# Altium PCB usb_to_can.PcbDoc
Units mm, origin at the board's own origin, x right, y up, seen from the top; angles counter-clockwise.
Board outline 46.4 x 30 mm, 4 copper layers (Top Layer, Signal Layer 1, Signal Layer 2, Bottom Layer), stack 0.778 mm thick; 58 components, 49 nets, 278 pads, 67 vias.
Unrouted connection lines stored in the file: 1.
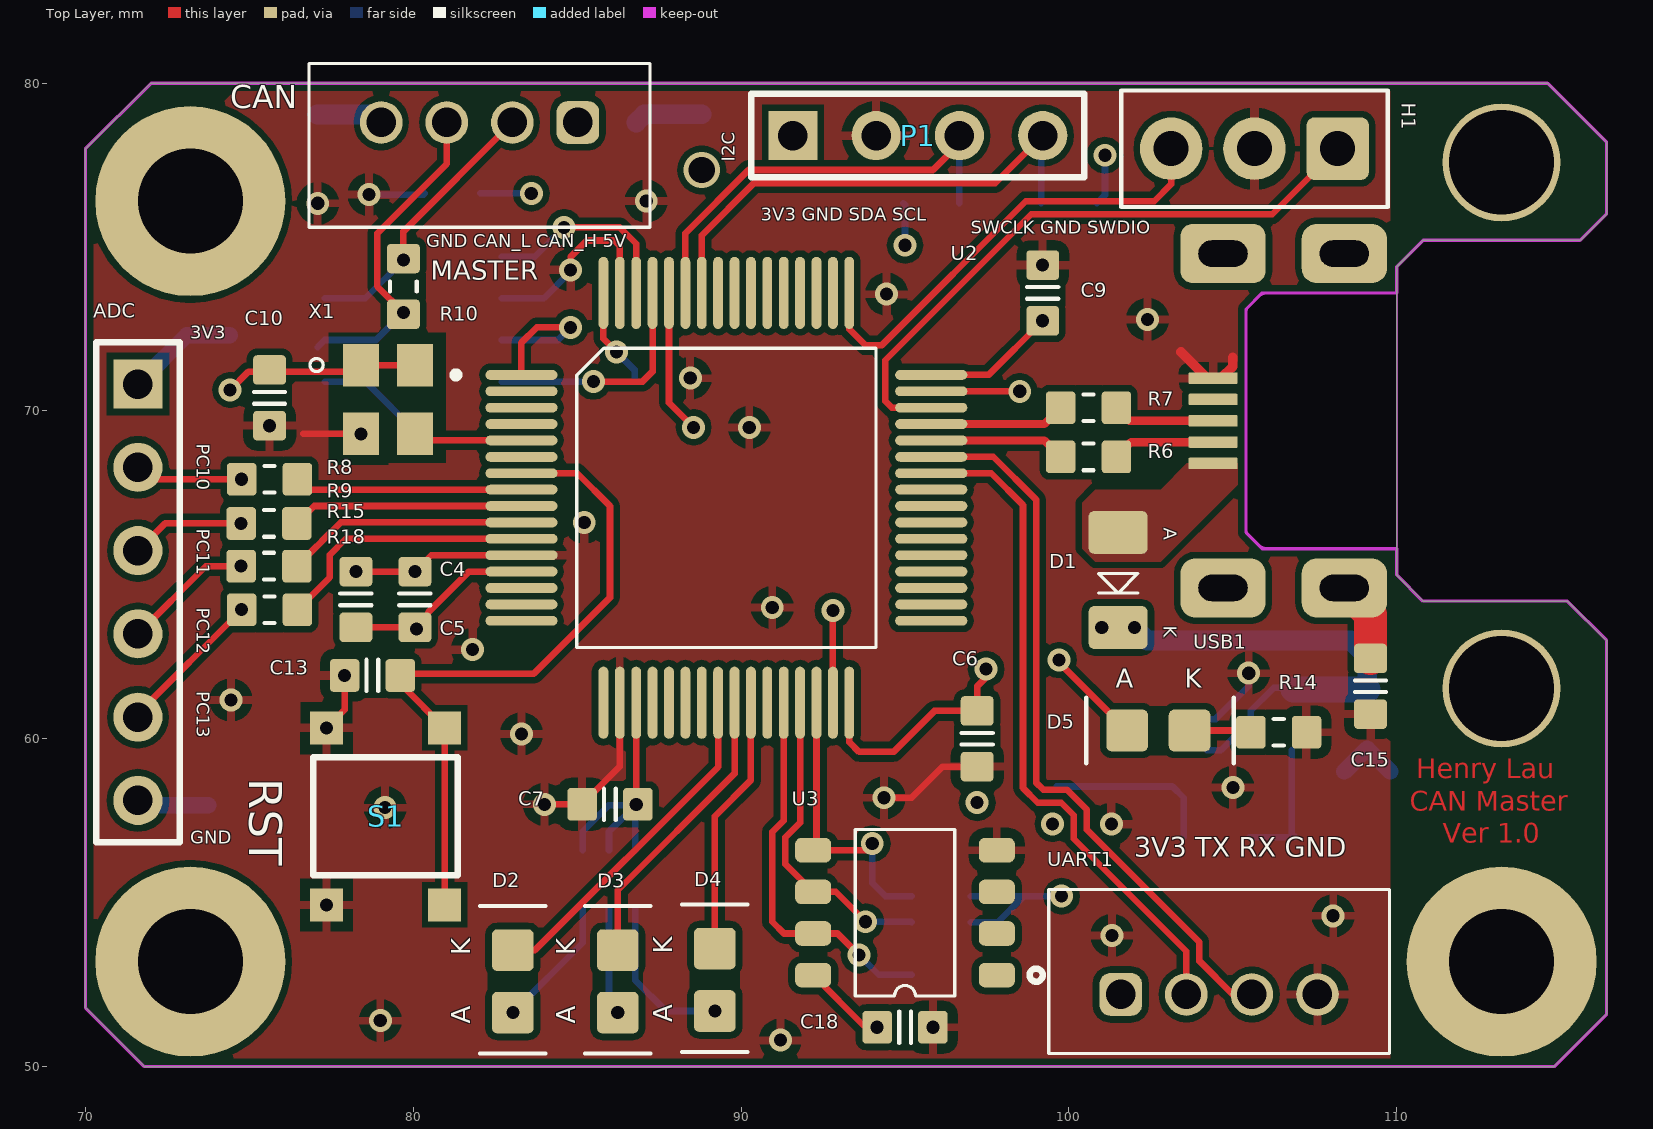
[diagram p0: Top Layer view]
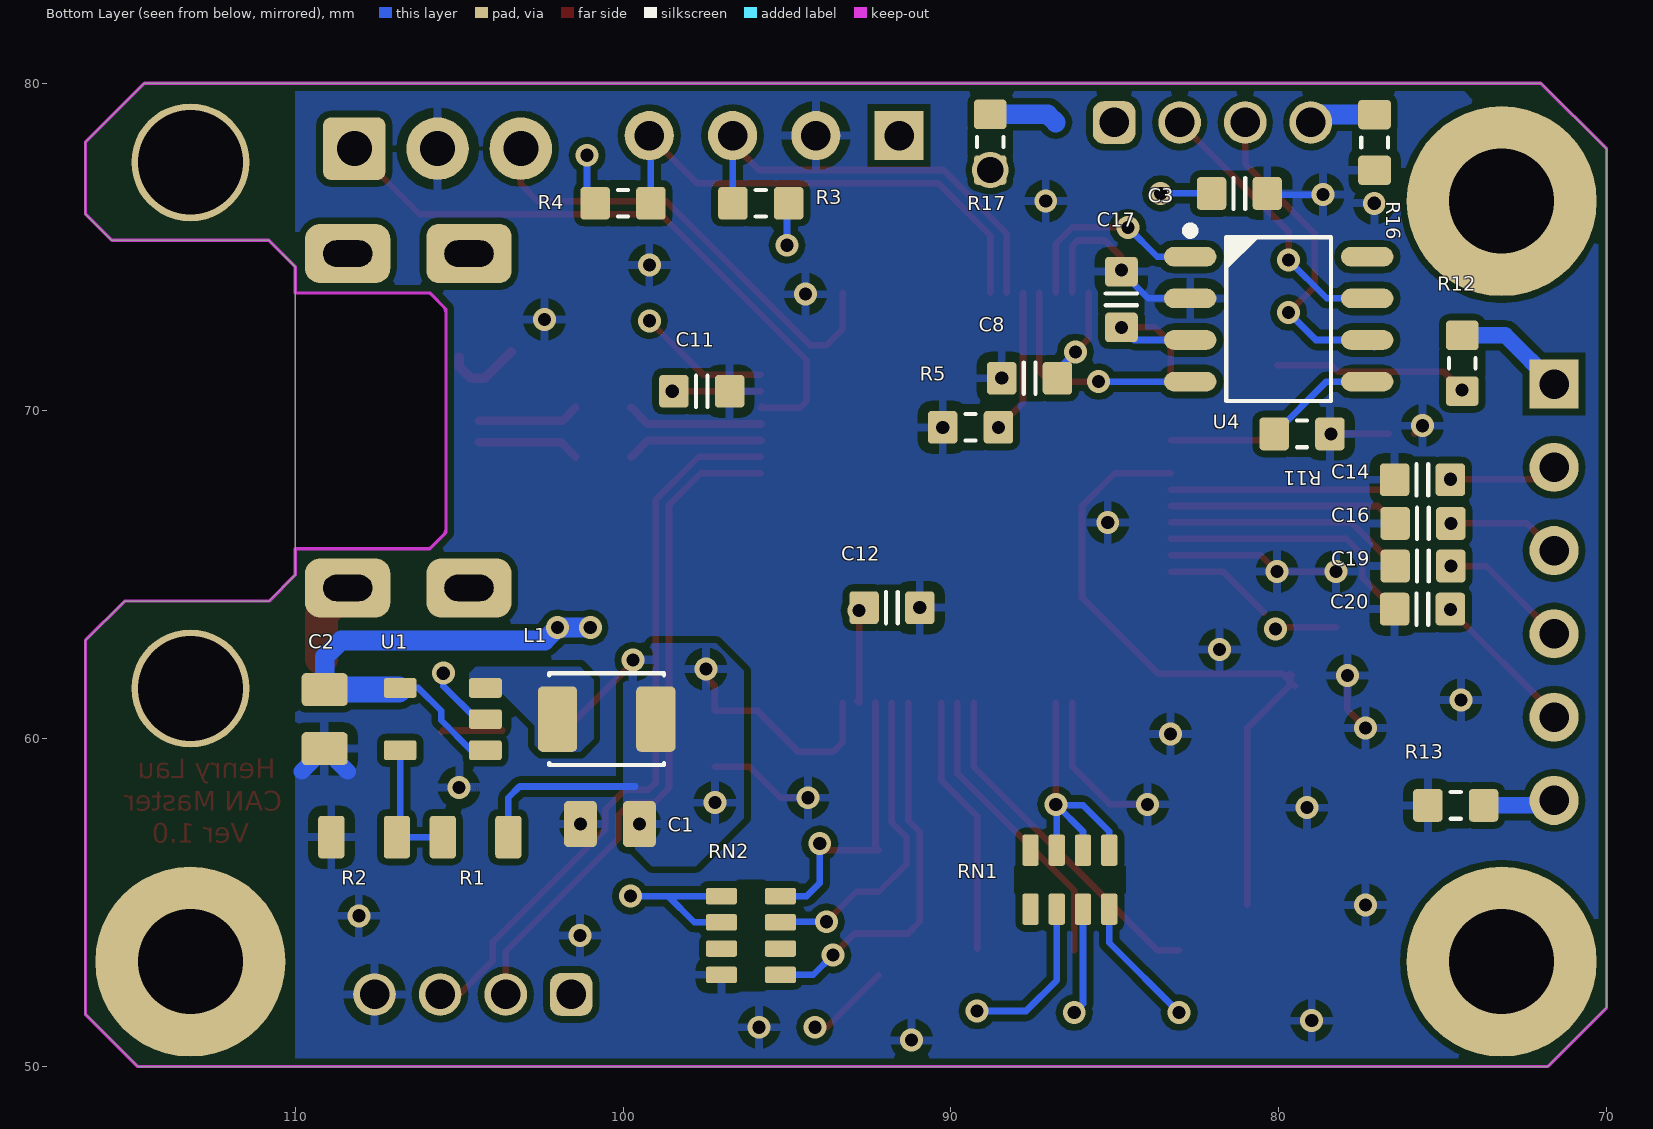
[diagram p1: Bottom Layer view, seen from below]
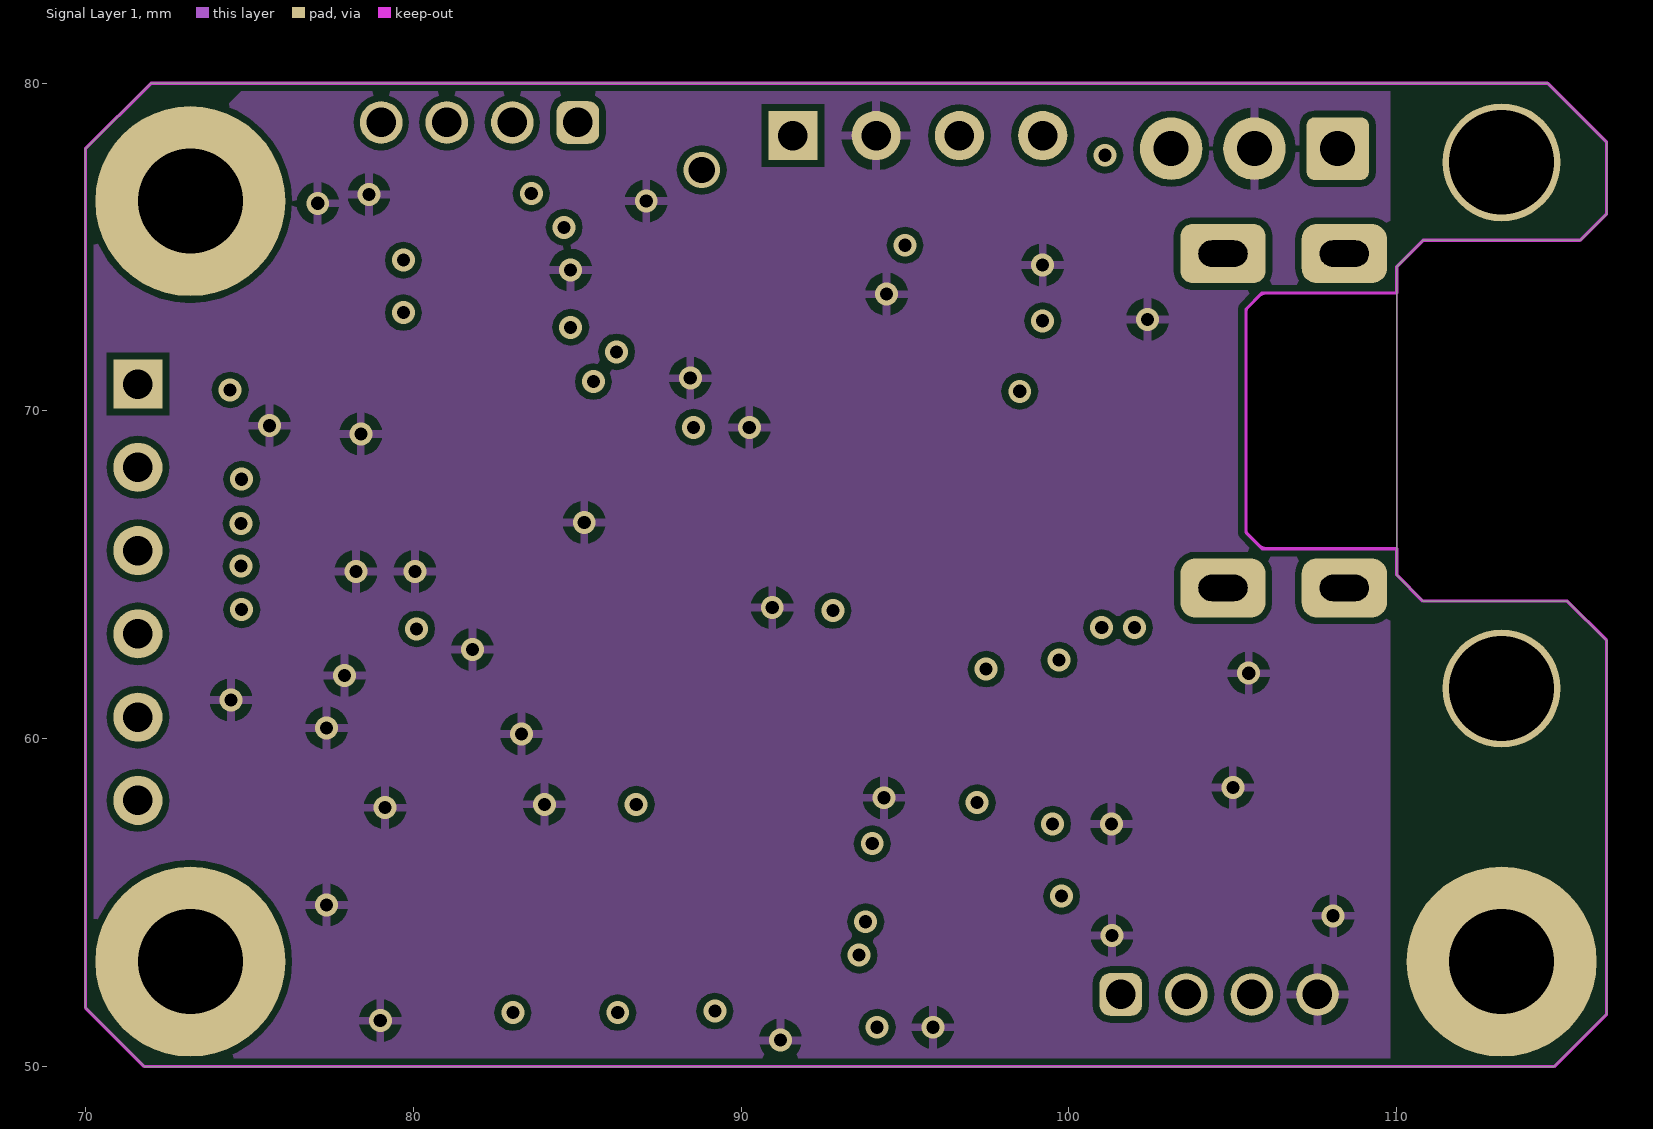
[diagram p2: Signal Layer 1]
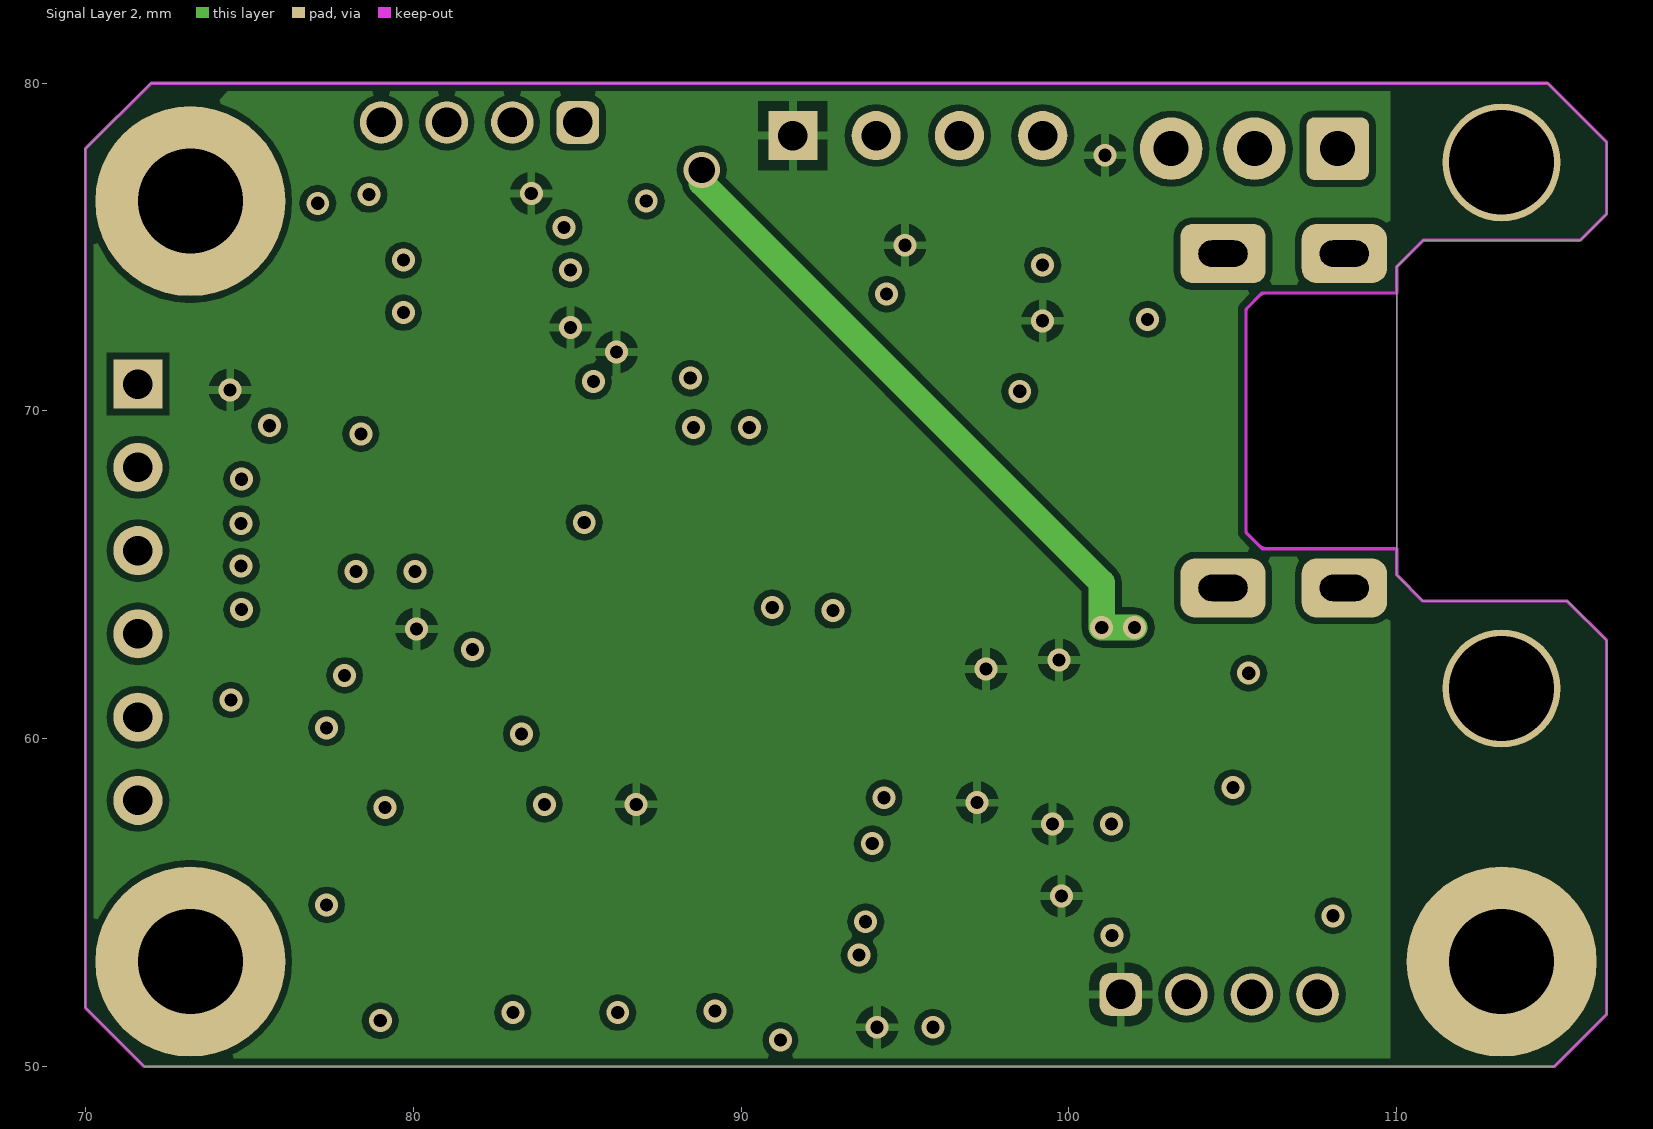
[diagram p3: Signal Layer 2]
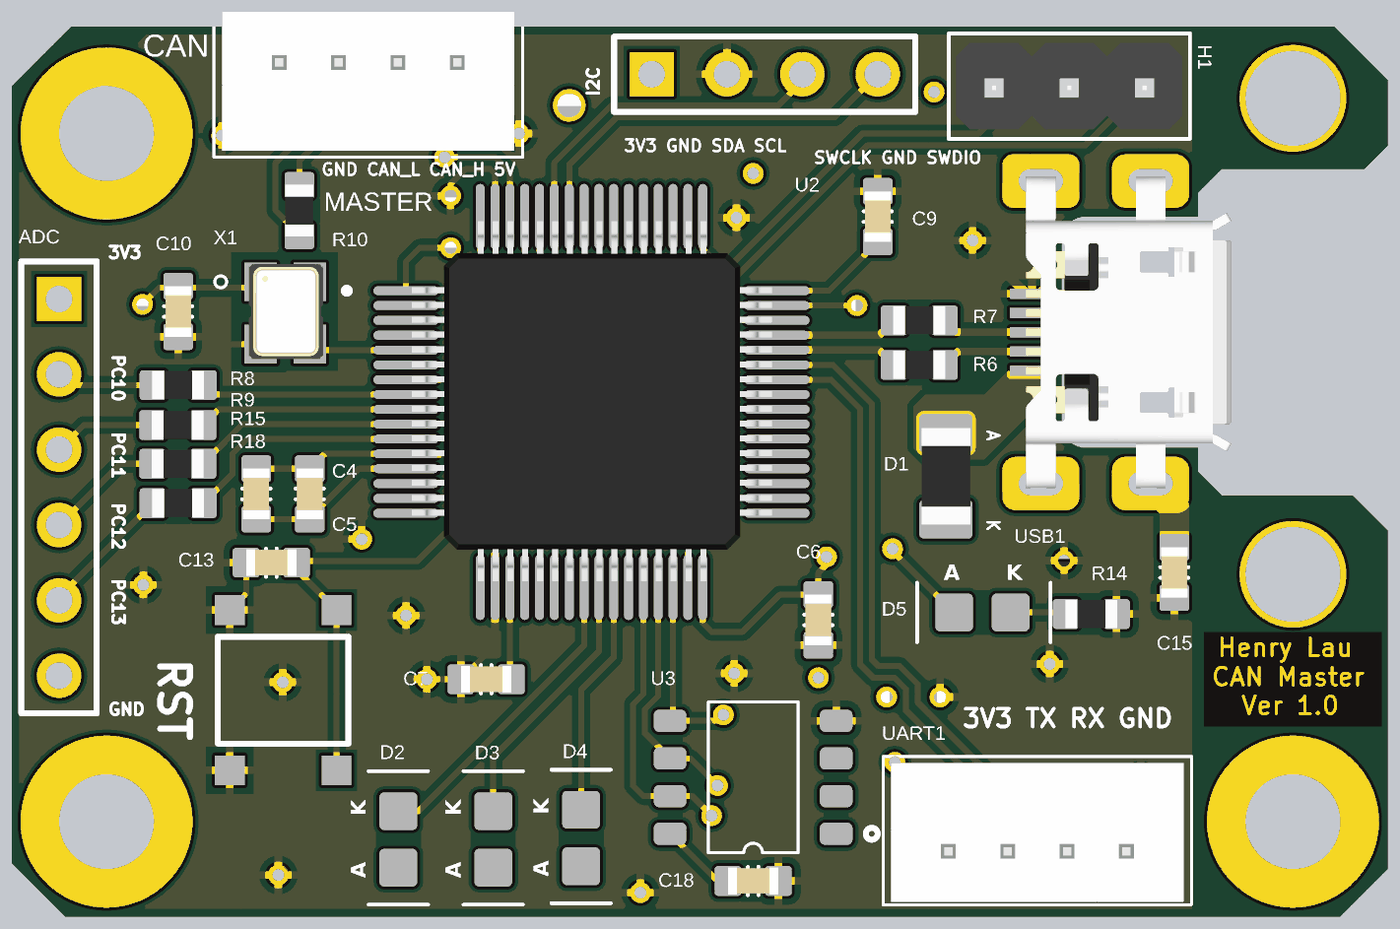
[diagram p4: 3D render of the assembled board from above, using the file's embedded part models]
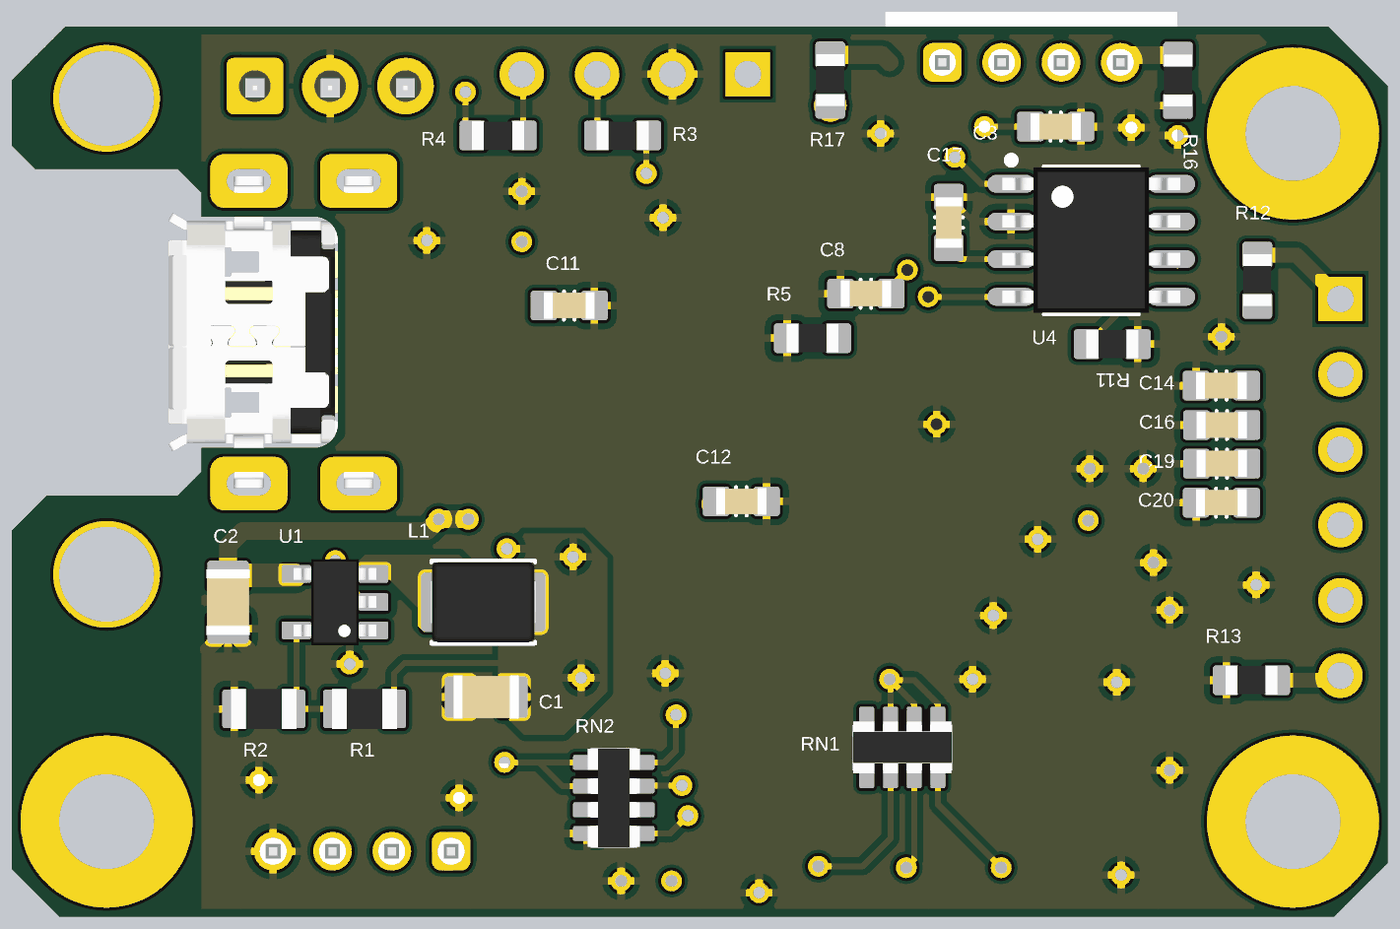
[diagram p5: 3D render of the assembled board from below, using the file's embedded part models]

## Layer stack, top to bottom
Top Solder: solder mask 0.0102, Solder Resist, Dk 3.5
Top Layer: signal copper 0.0356
Dielectric 1: core 0.254, FR-4, Dk 4.2
Signal Layer 1: signal copper 0.036
Dielectric 3: prepreg 0.127, Dk 4.2
Signal Layer 2: signal copper 0.036
Dielectric 2: core 0.254, Dk 4.2
Bottom Layer: signal copper 0.0356
Solder Side: solder mask 0.0102, Solder Resist, Dk 3.5

## Board outline
70,51.8 70,78 72,80 110,80 114.6,80 116.4,78.2 116.4,76 115.6,75.2 110.8,75.2 110,74.4 110,65 110.8,64.2 115.2,64.2 116.4,63 116.4,51.6 114.8,50 110,50 71.8,50

## Design rules (kind name [scope] priority, off if disabled: settings)
Clearance [All] p1: gap=0.2 ignorepadtopadclearanceinfootprint=FALSE
HoleSize [All] p1: absolutevalues=TRUE maxlimit=100 minlimit=0.4 maxpercent=80.000 minpercent=20.000
MinimumSolderMaskSliver [All] p1: minsoldermaskwidth=0.08
PolygonConnect power [InNet('NETL1_1','NetD1_A') OR InComponent('C1','L1')] p1: connectstyle=Direct reliefconductorwidth=0.254 reliefentries=4 polygonreliefangle="90 Angle" airgapwidth=0.254
PolygonConnect [All] p2: connectstyle=Relief reliefconductorwidth=0.254 reliefentries=4 polygonreliefangle="90 Angle" airgapwidth=0.3
RoutingVias [All] p1: holewidth=0.4 width=0.7 viastyle="Through Hole" minholewidth=0.4 minwidth=0.7 maxholewidth=99 maxwidth=100
SilkToSilkClearance [All] p1: silktosilkclearance=0.08
SilkToSolderMaskClearance [IsPad] p1: minsilkscreentomaskgap=0.08 clearancetoexposedcopper=TRUE
SolderMaskExpansion [All] p1: expansion=0.102
Width [All] p1: maxlimit=100 minlimit=0.2 preferedwidth=0.2
26 further rules are at their usual default settings.

## Components (designator, comment, footprint, x,y, rotation, side; value= is the part's Value field where it differs from the comment)
ADC "Header 6" HDR1X6 71.6,70.82 r270 top
C1 "Cap" CAPC2012X135N 100.4,57.4 r180 bottom value=22u
C2 "Cap" CAPC2012X135N 109.103,60.6 r90 bottom value=10u
C3 "Cap" CAPC1608X90N 81.2,76.634 r0 bottom value=1u
C4 "Cap" CAPC1608X90N 78.25,64.25 r270 top value=1u
C5 "Cap" CAPC1608X90N 80.05,64.25 r270 top value=1u
C6 "Cap" CAPC1608X90N 97.2,60 r90 top value=1u
C7 "Cap" CAPC1608X90N 86,58 r0 top value=1u
C8 "Cap" CAPC1608X90N 87.6,71 r180 bottom value=1u
C9 "Cap" CAPC1608X90N 99.2,73.6 r270 top value=0.1u
C10 "Cap" CAPC1608X90N 75.615,70.4 r90 top value=1u
C11 "Cap" CAPC1608X90N 97.6,70.6 r0 bottom value=4.7u
C12 "Cap" CAPC1608X90N 91.8,64 r0 bottom value=4.7u
C13 "Cap" CAPC1608X90N 78.755,61.932 r0 top value=0.1u
C14 "Cap" CAPC1608X90N 75.615,67.9 r180 bottom value=0.1u
C15 "Cap" CAPC1608X90N 109.2,61.6 r270 top value=10p
C16 "Cap" CAPC1608X90N 75.6,66.57 r180 bottom value=0.1u
C17 "Cap" CAPC1608X90N 84.8,73.4 r270 bottom value=0.1u
C18 "Cap" CAPC1608X90N 95,51.2 r0 top value=0.1u
C19 "Cap" CAPC1608X90N 75.6,65.27 r180 bottom value=0.1u
C20 "Cap" CAPC1608X90N 75.615,63.955 r180 bottom value=0.1u
CAN "Header 4" 1X4_HDR_2.00mm_PH 85.022,78.8 r180 top
D1 "diode" DIODE_3216_70N 101.5,64.844 r270 top
D2 "LED_Green_GullWing" LED-0805-A 83.038,52.6 r90 top
D3 "LED_Green_GullWing" LED-0805-A 86.238,52.6 r90 top
D4 "LED_Green_GullWing" LED-0805-A 89.2,52.647 r90 top
D5 "LED_Green_GullWing" LED-0805-A 102.728,60.252 r0 top
H1 "ST-Link" 1x3POS_HEADER 105.66,78 r270 top
L1 "inductor" INDM3225X240N 100.5,60.6 r180 bottom value=2u2
P1 "Header 4" HDR1X4 91.58,78.4 r0 top
R1 "Res1" RESC2012X70N 104.5,57 r180 bottom value=100K
R2 "Res1" RESC2012X70N 107.9,57 r180 bottom value=22K
R3 "Res1" RESC1608X55N 95.8,76.334 r180 bottom value=4K7
R4 "Res1" RESC1608X55N 100,76.334 r0 bottom value=4K7
R5 "Res1" RESC1608X55N 89.4,69.5 r180 bottom value=10K
R6 "Res1" RESC1608X55N 100.6,68.6 r0 top value=22R
R7 "Res1" RESC1608X55N 100.6,70.1 r0 top value=22R
R8 "Res1" RESC1608X55N 75.615,67.918 r180 top value=1K
R9 "Res1" RESC1608X55N 75.6,66.57 r180 top value=1K
R10 "Res1" RESC1608X55N 79.7,73.8 r270 top value=120
R11 "Res1" RESC1608X55N 79.289,69.3 r0 bottom value=20K
R12 "Res1" RESC1608X55N 74.4,71.456 r270 bottom value=0R
R13 "Res1" RESC1608X55N 74.6,57.968 r0 bottom value=0R
R14 "Res1" RESC1608X55N 106.4,60.2 r0 top value=1K
R15 "Res1" RESC1608X55N 75.6,65.266 r180 top value=1K
R16 "Res1" RESC1608X55N 77.077,78.192 r270 bottom value=0R
R17 "Res1" RESC1608X55N 88.8,78.2 r270 bottom value=0R
R18 "Res1" RESC1608X55N 75.615,63.938 r180 top value=1K
RN1 "resistor network" RESCAXS50P160X320X70-8N 86.371,55.7 r270 bottom value=1K
RN2 "resistor network" RESCAXS50P160X320X70-8N 96.1,54 r180 bottom value=4K7
S1 "SW_THT_PB_4.3mm" TACT_SWT-SMD-4.4 76.955,55.432 r90 top
U1 "TLV62569" SOT23-5 105.5,60.6 r0 bottom
U2 "STM32F405RE" LQFP64 83.3,71.1 r0 top
U3 "EEPROM" SOP8 97.8,52.79 r180 top
U4 "SN65HVD23x" SOIC127P600X175-8AN 80,72.8 r180 bottom
UART1 "Programmer" 1X4_HDR_2.00mm_PH 101.582,52.2 r0 top
USB1 "USB Micro Type B" USB_MICRO-B 110,69.7 r90 top
X1 "ASE-8.000MHZ-LC-T" "ASE Series" 80.05,71.4 r270 top

## Footprints (in the part's own frame and the unit in brackets; to place one, negate y for a bottom-side part, rotate by r counter-clockwise, add the part's x,y. Pads: shape width x height; smd on the part's side, far side on the other; paste and mask are expansions set on the pad)
1x3POS_HEADER [mil] "Connector Header, Single-row 3-position, 0.100\" pitch"
  rrect25% 75x75 hole 42: 1(0,100)
  round 75 hole 42: 2(0,0) 3(0,-100)
  silkscreen extent -70,-160 70,160, body extent -57,-150 57,150, height 335
1X4_HDR_2.00mm_PH [mm]
  rrect50% 1.3x1.3 hole 0.9: 1(0,0)
  round 1.3 hole 0.9: 2(2,0) 3(4,0) 4(6,0)
  silkscreen extent -2.2,-1.8 8.2,3.2, body extent -1.93,-1.7 7.93,2.97, height 5.89
"ASE Series" [mm] "Footprint used for ASE SERIES standard clock oscillator"
  rect 1.3x1.1 smd: 1(0,-1.65) 2(2.1,-1.65) 3(2.1,0) 4(0,0)
  silkscreen extent -0.2,-3.2 0.2,-2.8, body extent -0.6,-2.05 2.6,0.45, height 1.2
CAPC1608X90N [mm] "Chip Capacitor, Body 1.6x0.8mm, EIA 0603, IPC Medium Density"
  round 0.254 on Mech15: 0(0,0)
  rrect25% 0.9x1 smd: 1(-0.85,0) 2(0.85,0)
  Top Layer pour cut-out: -0.6,0.5 -0.4,0.7 0.4,0.7 0.6,0.5 0.6,-0.5 0.4,-0.7 -0.4,-0.7 -0.6,-0.5
  silkscreen extent -0.18,-0.48 0.18,0.48, body extent -0.85,-0.45 0.85,0.45, height 0.89
CAPC2012X135N [mm]
  round 0.254 on Mech15: 0(0,0)
  rrect25% 1x1.4 smd: 1(-0.9,0) 2(0.9,0)
  body extent -1.1,-0.72 1.1,0.73, height 1.34
DIODE_3216_70N [mm]
  round 0.508 on Mech15: 0(0,0)
  rrect25% 1.3x1.8 smd: A(-1.45,0) K(1.45,0)
  silkscreen extent -0.2,-0.6 0.4,0.6, body extent -1.62,-0.82 1.63,0.83, height 0.69
HDR1X4 [mm] "Connector; Header; 4 Position"
  rect 1.5x1.5 hole 0.9: 1(0,0)
  round 1.5 hole 0.9: 2(2.54,0) 3(5.08,0) 4(7.62,0)
  silkscreen extent -1.27,-1.27 8.89,1.27
HDR1X6 [mm] "Connector; Header; 6 Position"
  rect 1.5x1.5 hole 0.9: 1(0,0)
  round 1.5 hole 0.9: 2(2.54,0) 3(5.08,0) 4(7.62,0) 5(10.16,0) 6(12.7,0)
  silkscreen extent -1.27,-1.27 13.97,1.27
INDM3225X240N [mm] "Molded Inductor, 2-Leads, Body 3.2x2.5mm, IPC Medium Density"
  round 0.508 on Mech15: 0(0,0)
  rrect25% 1.2x2 smd: 1(-1.5,0) 2(1.5,0)
  silkscreen extent -1.75,-1.4 1.75,1.4, body extent -1.79,-1.35 1.79,1.35, height 2.4
LED-0805-A [mil]
  round 20 on Mech15: 0(0,0)
  rrect25% 50x50 smd: A(-37.5,0) K(37.5,0)
  Top Layer pour cut-out: -15,30 15,30 15,-30 -15,-30
  silkscreen extent -87,-39 91,39, body extent -39,-25 39,25, height 31
LQFP64 [mm]
  oval 2.2x0.3 smd: 1(0,0) 2(0,-0.5) 3(0,-1) 4(0,-1.5) 5(0,-2) 6(0,-2.5) 7(0,-3) 8(0,-3.5) 9(0,-4) 10(0,-4.5) 11(0,-5) 12(0,-5.5) 13(0,-6) 14(0,-6.5) 15(0,-7) 16(0,-7.5) 33(12.5,-7.5) 34(12.5,-7) 35(12.5,-6.5) 36(12.5,-6) 37(12.5,-5.5) 38(12.5,-5) 39(12.5,-4.5) 40(12.5,-4) 41(12.5,-3.5) 42(12.5,-3) 43(12.5,-2.5) 44(12.5,-2) 45(12.5,-1.5) 46(12.5,-1) 47(12.5,-0.5) 48(12.5,0)
  oval 0.3x2.2 smd: 17(2.5,-10) 18(3,-10) 19(3.5,-10) 20(4,-10) 21(4.5,-10) 22(5,-10) 23(5.5,-10) 24(6,-10) 25(6.5,-10) 26(7,-10) 27(7.5,-10) 28(8,-10) 29(8.5,-10) 30(9,-10) 31(9.5,-10) 32(10,-10) 49(10,2.5) 50(9.5,2.5) 51(9,2.5) 52(8.5,2.5) 53(8,2.5) 54(7.5,2.5) 55(7,2.5) 56(6.5,2.5) 57(6,2.5) 58(5.5,2.5) 59(5,2.5) 60(4.5,2.5) 61(4,2.5) 62(3.5,2.5) 63(3,2.5) 64(2.5,2.5)
  silkscreen extent -2.1,-8.31 10.81,0.81, body extent 0.2,-9.8 12.34,2.34, height 1.6
RESC1608X55N [mm] "Chip Resistor, Body 1.6x0.8mm, EIA 0603, IPC Medium Density"
  round 0.254 on Mech15: 0(0,0)
  rrect25% 0.9x1 smd: 1(-0.85,0) 2(0.85,0)
  Top Layer pour cut-out: -0.6,0.5 -0.4,0.7 0.4,0.7 0.6,0.5 0.6,-0.5 0.4,-0.7 -0.4,-0.7 -0.6,-0.5
  silkscreen extent -0.15,-0.41 0.15,0.41, body extent -0.87,-0.47 0.88,0.48, height 0.54
RESC2012X70N [mm]
  rrect25% 0.8x1.3 smd: 1(-1,0) 2(1,0)
  body extent -1.1,-0.67 1.1,0.68, height 0.69
RESCAXS50P160X320X70-8N [mm] "Resistor Pack, Body 1.6x3.2mm, 4x0603, IPC Medium Density"
  round 0.254 on Mech15: 0(0,0)
  rrect25% 0.95x0.5 smd: 1(-0.9,1.2) 2(-0.9,0.4) 3(-0.9,-0.4) 4(-0.9,-1.2) 5(0.9,-1.2) 6(0.9,-0.4) 7(0.9,0.4) 8(0.9,1.2)
  Top Layer pour cut-out: -0.4,1.7 0.4,1.7 0.4,-1.7 -0.4,-1.7
  body extent -0.87,-1.68 0.88,1.67, height 0.7
SOIC127P600X175-8AN [mm] "SOIC, 8-Leads, Body 4.9x3.9mm, Pitch 1.27mm, IPC Medium Density"
  round 1 on Mech15: 0(0,0)
  oval 1.6x0.6 smd: 1(-2.7,1.905) 2(-2.7,0.635) 3(-2.7,-0.635) 4(-2.7,-1.905) 5(2.7,-1.905) 6(2.7,-0.635) 7(2.7,0.635) 8(2.7,1.905)
  silkscreen extent -2.83,-2.5 1.6,2.82, body extent -3,-2.45 3,2.45, height 1.75
SOP8 [mm]
  rrect50% 1.1x0.75 smd: 1(0,0) 2(0,-1.27) 3(0,-2.54) 4(0,-3.81) 5(5.6,-3.81) 6(5.6,-2.54) 7(5.6,-1.27) 8(5.6,0)
  silkscreen extent -1.4,-4.44 4.32,0.64
SOT23-5 [mm]
  rrect25% 1x0.6 smd: 1(-1.3,0.95) 2(-1.3,0) 3(-1.3,-0.95) 4(1.3,-0.95) 5(1.3,0.95)
  body extent -1.4,-1.45 1.4,1.45, height 1.44
TACT_SWT-SMD-4.4 [mm]
  rect 1x1 smd mask+0.102: 1(-0.5,-4) 1(4.9,-4) 2(-0.5,-0.4) 2(4.9,-0.4)
  silkscreen extent 0.4,-4.4 4,0
USB_MICRO-B [mm]
  round 0.508 on Mech15: 0(0,0)
  rrect20% 0.35x1.5 smd: 1(-1.3,5.6) 2(-0.65,5.6) 3(0,5.6) 4(0.65,5.6) 5(1.3,5.6)
  rrect50% 1.8x2.6 hole 0.8 slot 1.5 at 90 deg: SH(-5.1,1.6) SH(-5.1,5.3) SH(5.1,1.6)
  rrect40% 1.8x2.6 hole 0.8 slot 1.5 at 90 deg: SH(5.1,5.3)
  Keep-Out Layer board cut-out: -3.9,0 -3.9,3.797 -3.839,4.103 -3.666,4.362 -3.406,4.536 -3.1,4.597 -3.1,4.597 3.1,4.597 3.406,4.536 3.666,4.362 3.839,4.103 3.9,3.797 3.9,3.797 3.9,0
  body extent -5.25,-1.12 5.25,5.8, height 2.15

## Part data
ADC: "Header, 6-Pin", LatestRevisionDate=17-Jul-2002, LatestRevisionNote="Re-released for DXP Platform.", Publisher="Altium Limited"
C1 C2 C3 C4 C5 C6 C7 C8 C9 C10 C11 C12 C13 C14 C15 C16 C17 C18 C19 C20: "Capacitor", LatestRevisionDate=17-Jul-2002, LatestRevisionNote="Re-released for DXP Platform.", PackageDescription="Radial Cap, Thru-Hole; 2 Leads; 0.3 in Pin Spacing", PackageReference=RAD-0.3, Published=8-Jun-2000, Publisher="Altium Limited"
CAN P1: "Header, 4-Pin", LatestRevisionDate=17-Jul-2002, LatestRevisionNote="Re-released for DXP Platform.", Publisher="Altium Limited"
D1: library part SD1206S040S2R0, "100V 1A", ComponentLink1Description=mouser, ComponentLink1URL=https://www.mouser.hk/ProductDetail/AVX/SD1206S040S2R0?qs=jCA%252BPfw4LHbfEJl0sZ31oA%3D%3D
D2 D3 D4 D5: "LED Gull-wing SMD High-intensity Green 450mcd 574nm", Color=Green, Manufacturer 1=Ligitek, Manufacturer Part Number 1=L8UG9033/TR1, Package / Case="4.6mm Gull-Wing", Ratings="450 mcd; 574 nm", Material=AlGaInP, SCDType=source
H1: "ST-Link header with silkscreen"
L1: library part INDC, "IHLP SMD 4040", link=http://www.mouser.hk/ProductDetail/Panasonic/ETQ-P5M4R7YFC/?qs=sGAEpiMZZMsg%252by3WlYCkUx1BJssUTVH58rrEHsPkNus%3d
R1 R2 R3 R4 R5 R6 R7 R8 R9 R10 R11 R12 R13 R14 R15 R16 R17 R18: "Resistor", LatestRevisionDate=17-Jul-2002, LatestRevisionNote="Re-released for DXP Platform.", PackageDescription="Axial Device, Thru-Hole; 2 Leads; 0.3 in Pin Spacing", PackageReference=AXIAL-0.3, Published=8-Jun-2000, Publisher="Altium Limited"
RN1 RN2: library part RES_NET
S1: "Switch, tact, 4.3mm stem", Manufacturer 1=Bond-Tact, Manufacturer Part Number 1=TS-1143-WP-300, Package / Case="6.5x6.5mm; 4.3mm stem", Function=Speed, Material="Brass/Nylon/Ag plating", SCDType=spec
U1: "2-A High Efficiency Synchronous Buck Converter in SOT Package", Manufacturer=TI, Iout(max)=2A, Vin=2.5-5.5V
U2: "STM32F405RE 64 pin package, Cortex M4 core with up to"
U3: library part AT24C64, "64K EEPROM"
U4: "SN65HVD23x 3.3-V CAN Bus Transceivers", ComponentLink1Description=Datasheet, ComponentLink1URL=https://www.ti.com/lit/ds/symlink/sn65hvd230.pdf?ts=1604457324049&ref_url=https%253A%252F%252Fwww.google.com%252F
UART1: library part Header4P, "Header 4-pin"
USB1: library part USB_Micro_TypeB, "Connector SMD USB Micro Type B middle mount", Manufacturer 1="Molex Inc", Manufacturer Part Number 1=47491-0001, Package / Case=SMD, Supplier Part Number 1=WM17142CT-ND, SCDType=undef, Supplier 1=Digi-Key
X1: "8MHz", ComponentLink1Description=Datasheet, ComponentLink1URL=https://www.mouser.hk/ProductDetail/ABRACON/ASE-8000MHZ-LC-T?qs=ShQ8XZQtgRsRMJ3lmGY0Sw%3D%3D

## Free pads (board coordinates)
  round 3.6 hole 3.2: 2(113.2,61.536) 2(113.2,77.585)
  round 5.8 hole 3.2: 3(113.2,53.2) 4(73.2,53.2) 4(73.2,76.4)

## Via types
v1: diameter 0.7, hole 0.4, Top Layer to Bottom Layer, 66 vias
v2: diameter 1.1, hole 0.8, Top Layer to Bottom Layer, 1 vias

## Nets (pads, with @x,y where several pads share a name; then routed paths per layer and width w, separated by ;. In a path a pad name is that pad's centre, name@x,y a point inside that pad or via, vN(x,y) a via of type N, cw(c..) or ccw(c..) an arc to the next point about the centre after c; other vN are vias at no path point)
3V3: C1.2 C3.2 C4.2 C5.2 C6.2 C7.2 C8.2 C9.2 C10.2 C17.2 C18.1 D5.A L1.2 P1.1 R1.2 R3.2 R4.2 R12.2 RN1.1 RN1.2 RN1.3 RN2.1 RN2.2 U2.1 U2.13 U2.19 U2.32 U2.48 U2.64 U3.8 U4.3 UART1.1 X1.1 X1.4 | length 59.2
  Top Layer w0.2: v1(74.415,70.639) 74.975,71.2 78.2,71.2 X1.1 X1.4 ; C4.2 C5.2 C5.2@80.25,63.4 ; 80.45,63.85 81.7,65.1 U2.13 ; U2.1 83.3,72.084 83.766,72.55 v1(84.8,72.55) ; U2.64 85.8,72.2 v1(86.2,71.8) ; U2.19 86.8,58.05 C7.2 ; U3.8 93.79,51.2 v1(94.15,51.2) ; U2.32 93.3,59.9 93.6,59.6 94.65,59.6 95.9,60.85 C6.2 97.2,61.598 97.473,61.871 v1(97.473,62.125) ; U2.48 97.55,71.1 v1(99.2,72.75) ; v1(99.7,62.4) 99.7,62.327 D5.A
  Bottom Layer w0.2: C3.2 v1(83.6,76.634) ; U4.3 84.415,72.165 v1(84.8,72.55) ; RN1.1 85.171,57.171 85.971,57.971 v1@86.771,57.971 ; RN1.2 85.971,57.171 v1@86.771,57.971 ; v1(86.2,71.8) 86.75,71.25 C8.2 ; RN1.3 v1@86.771,57.971 ; v1(86.8,58) v1@86.771,57.971 ; R3.2 95,76.284 v1(95,75.055) ; RN2.2 97.832,54.4 98.632,55.2 ; RN2.1 98.632,55.2 ; 99.629,58.544 103.156,58.544 103.5,58.2 R1.2 ; v1(99.777,55.2) 98.632,55.2 ; R4.2 101.1,76.584 v1(101.1,77.8)
  other v1: 99.5,57.4 97.2,58.05 80.1,63.35
5V: C2.2 D1.K R17.2 U1.1 U1.4 | length 35.6
  Top Layer w0.2: D1.K@101.775,63.169 v1(102,63.394)
  Signal Layer 2 w0.8: v2(88.8,77.35) 88.8,76.961 101,64.761 v1(101,63.394) v1(102,63.394)
  Bottom Layer w0.2: U1.1 104.635,59.65 105.55,60.565 105.55,60.853 106.247,61.55 U1.4
  Bottom Layer w0.6: v1(101,63.394) v1(102,63.394) 102.394,63 108.6,63 109.103,62.497 C2.2
  Bottom Layer w0.8: U1.4@106.85,61.5 C2.2
ADC1_IN10: R8.1 U2.8 | length 7
  Top Layer w0.2: R8.1 76.783,67.6 U2.8
ADC1_IN11: R9.1 U2.9 | length 7.1
  Top Layer w0.2: R9.1 76.98,67.1 U2.9
ADC1_IN12: R15.1 U2.10 | length 7.4
  Top Layer w0.2: R15.1 76.954,65.77 76.958,65.77 77.2,66.011 77.2,66.016 77.784,66.6 U2.10
ADC1_IN13: R18.1 U2.11 | length 8.1
  Top Layer w0.2: R18.1 77.45,64.923 77.45,65.608 77.942,66.1 U2.11
ADC_IN10: ADC.2 C14.2 R8.2 | length 3.3
  Top Layer w0.2: ADC.2 71.962,67.918 v1(74.765,67.918)
ADC_IN11: ADC.3 C16.2 R9.2 | length 3.5
  Top Layer w0.2: ADC.3 72.43,66.57 v1(74.75,66.57)
ADC_IN12: ADC.4 C19.2 R15.2 | length 4
  Top Layer w0.2: ADC.4 73.666,65.266 v1(74.75,65.266)
ADC_IN13: ADC.5 C20.2 R18.2 | length 4.6
  Top Layer w0.2: ADC.5 71.6,60.773 v1(74.765,63.938)
CAN_H: CAN.2 R10.1 U4.7 | length 8.5
  Top Layer w0.2: v1(79.7,74.6) 79.7,75.478 CAN.2
  Bottom Layer w0.2: U4.7 78.535,73.435 v1(79.7,74.6)
CAN_L: CAN.3 R10.2 U4.6 | length 10.1
  Top Layer w0.2: v1(79.7,73) 78.9,73.8 78.9,75.414 81.022,77.535 CAN.3
  Bottom Layer w0.2: U4.6@77.085,71.95 U4.6 78.865,72.165 v1(79.7,73)
CAN_RX: U2.61 U4.4 | length 7.1
  Top Layer w0.2: v1(85.495,70.895) 86.995,70.895 87.3,71.2 U2.61
  Bottom Layer w0.2: U4.4 v1(85.495,70.895)
CAN_TX: U2.62 U4.1 | length 6.2
  Top Layer w0.2: v1(84.6,75.6) 86.3,75.6 86.8,75.1 U2.62
  Bottom Layer w0.2: U4.1 83.705,74.705 v1(84.6,75.6)
GND: C1.1 C2.1 C3.1 C4.1 C5.1 C6.1 C7.1 C8.1 C9.1 C10.1 C11.1 C12.1 C13.1 C14.1 C15.2 C16.1 C17.1 C18.2 C19.1 C20.1 H1.2 P1.2 R2.1 R5.1 R11.1 R13.2 R14.2 R16.2 RN2.4 S1.2 U1.2 U2.12 U2.18 U2.63 U3.4 U4.2 UART1.4 USB1.5 X1.2 | length 31.4
  Top Layer w0.2: v1(75.615,69.55) C10.1@75.865,69.3 ; 76.65,69.3 v1(78.4,69.3) ; v1(77.355,60.332) 77.905,60.882 v1(77.905,61.932) ; C4.1@78.3,65.15 v1(78.25,65.1) v1(80.05,65.1) 80.55,65.6 U2.12 ; v1(84,58) C7.1 86.3,59.15 U2.18 ; v1(84.8,74.3) 84.8,74.7 85.3,75.2 86.134,75.2 86.3,75.034 U2.63 ; v1(94.361,58.2) 95.2,58.2 96.15,59.15 C6.1
  Top Layer w0.3: 103.417,71.8 104.217,71 USB1.5 104.646,71 105,71.354 105,71.639
  Bottom Layer w0.2: v1(78.65,76.6) 80.316,76.6 C3.1 ; U4.2 83.985,73.435 C17.1 ; U1.2 104.475,60.6 105.485,61.61 v1(105.485,62)
  Bottom Layer w0.5: 108.4,59 108.403,59 C2.1 109.103,59.697 109.8,59
  other v1: 91.2,50.805 95.85,51.2 78.994,51.4 101.315,54 108.061,54.6 77.355,54.932 101.3,57.4 79.142,57.898 105,58.514 83.3,60.15 74.439,61.182 81.803,62.721 90.95,64 85.215,66.6 90.25,69.5 88.45,71 102.4,72.795 94.439,73.562 99.2,74.45 77.085,76.334 87.106,76.4
I2C1_SCL: P1.4 R4.1 U2.58 | length 15.5
  Top Layer w0.2: U2.58 88.8,75.356 90.394,76.95 97.75,76.95 P1.4
  Bottom Layer w0.2: R4.1 99.15,78.35 P1.4
I2C1_SDA: P1.3 R3.1 U2.59 | length 13.6
  Top Layer w0.2: U2.59 88.3,75.422 90.228,77.35 95.85,77.35 96.66,78.16 P1.3
  Bottom Layer w0.2: R3.1 96.65,78.39 P1.3
I2C2_SCL: RN2.7 U2.29 U3.6 | length 9.7
  Top Layer w0.2: U2.29 91.8,57.439 91.35,56.989 91.35,56.18 U3.6 92.888,55.33 v1(93.8,54.418)
  Bottom Layer w0.2: v1(93.8,54.418) 95.182,54.418 RN2.7
I2C2_SDA: RN2.8 U2.30 U3.5 | length 9
  Top Layer w0.2: U2.30 92.3,56.7 U3.5 93.8,56.6 v1(94,56.8)
  Bottom Layer w0.2: v1(94,56.8) 94,55.6 94.4,55.2 RN2.8
LED1: D2.K U2.24 | length 10.5
  Top Layer w0.2: D2.K 83.711,53.552 89.3,59.142 U2.24
LED2: D3.K U2.25 | length 9
  Top Layer w0.2: D3.K 86.238,55.377 89.8,58.939 U2.25
LED3: D4.K U2.26 | length 8
  Top Layer w0.2: D4.K 89.2,57.639 90.3,58.739 U2.26
NetADC_1: ADC.1 R12.1 | length 3.4
  Bottom Layer w0.5: ADC.1 73.086,72.306 R12.1
NetADC_6: ADC.6 R13.1 | length 2.2
  Bottom Layer w0.5: ADC.6 71.752,57.968 R13.1
NetC11_2: C11.2 U2.47 | length 2.7
  Top Layer w0.2: U2.47 v1(98.5,70.6)
NetC12_2: C12.2 U2.31 | length 2.9
  Top Layer w0.2: v1(92.8,63.912) U2.31 U2.31@92.85,61.15
NetC13_2: C13.2 S1.1 U2.7 | length 21.2
  Top Layer w0.2: C13.2@79.5,61.6 C13.2@79.655,61.755 ; C13.2 C13.2@79.655,61.932 ; C13.2@79.655,61.987 C13.2@79.655,61.932 ; S1.1@80.955,54.932 80.955,60.332 79.655,61.632 C13.2@79.655,61.755 ; U2.7 84.998,68.1 86,67.098 86,64.306 83.681,61.987 79.887,61.987 C13.2@79.655,61.755 ; C13.2@79.655,61.755 C13.2@79.655,61.932
NetC15_1: C15.1 USB1.SH | length 2.5
  Top Layer w1: USB1.SH@108.4,64.6 109.2,63.8 C15.1
NetCAN_1: CAN.1 R17.1 | length 2.1
  Bottom Layer w0.6: 86.8,78.8 87.05,79.05 R17.1
NetCAN_4: CAN.4 R16.1 | length 2
  Bottom Layer w0.6: R16.1 78.78,79.042 CAN.4
NetD1_A: D1.A USB1.1
NetD2_A: D2.A RN1.8 | length 4
  Bottom Layer w0.2: v1(83.038,51.647) 85.171,53.78 RN1.8
NetD3_A: D3.A RN1.7 | length 3.3
  Bottom Layer w0.2: RN1.7 85.971,51.915 v1(86.238,51.647)
NetD4_A: D4.A RN1.6 | length 5
  Bottom Layer w0.2: RN1.6 86.771,52.629 87.705,51.695 v1(89.2,51.695)
NetD5_K: D5.K R14.1 | length 1.9
  Top Layer w0.2: D5.K 105.498,60.252 R14.1
NetL1_1: L1.1 U1.3
NetR1_1: R1.1 R2.2 U1.5 | length 4.1
  Bottom Layer w0.2: R1.1 R2.2 106.8,57.1 U1.5
NetR5_2: R5.2 U2.60 | length 4.5
  Top Layer w0.2: U2.60 87.8,70.25 v1(88.55,69.5) v1@88.6,69.45
NetR6_2: R6.2 USB1.2 | length 3.1
  Top Layer w0.254: R6.2 101.9,69.05 USB1.2
NetR7_2: R7.2 USB1.3 | length 3.1
  Top Layer w0.254: R7.2 101.85,69.7 USB1.3
NetR11_2: R11.2 U4.5 | length 3.5
  Bottom Layer w0.2: U4.5 78.544,70.895 R11.2
NetU2_5: U2.5 X1.3 | length 3.3
  Top Layer w0.2: X1.3 80.25,69.1 U2.5
SP: RN2.5 U2.28 U3.7 | length 11.7
  Top Layer w0.2: U2.28 91.3,57.505 90.95,57.155 90.95,54.418 91.308,54.06 U3.7 92.94,54.06 v1(93.6,53.4)
  Bottom Layer w0.2: v1(93.6,53.4) 94.2,52.8 RN2.5
SWCLK: H1.3 U2.49 | length 14.2
  Top Layer w0.2: U2.49 93.3,72.5 93.8,72 94.284,72 98.684,76.4 102.6,76.4 103.12,76.92 H1.3
SWDIO: H1.1 U2.46 | length 19.3
  Top Layer w0.2: U2.46@95.75,70.15 U2.46 94.6,70.1 94.4,70.3 94.4,71.55 98.85,76 106.2,76 H1.1
UART1_RX: U2.43 UART1.3 | length 22.3
  Top Layer w0.2: U2.43 97.695,68.6 99,67.295 99,58.666 99.216,58.45 99.935,58.45 100.55,57.835 100.55,57.222 103.982,53.79 103.982,53.218 105,52.2 UART1.3
UART1_TX: U2.42 UART1.2 | length 20.8
  Top Layer w0.2: U2.42 97.629,68.1 98.6,67.129 98.6,58.5 99.05,58.05 99.769,58.05 100.15,57.669 100.15,56.95 103.582,53.518 UART1.2 UART1.2@103.582,52
USB_DN: R6.1 U2.44 | length 4.2
  Top Layer w0.254: U2.44 99.25,69.1 R6.1
USB_DP: R7.1 U2.45 | length 4.2
  Top Layer w0.254: U2.45 99.25,69.6 R7.1
pads on no net: C1.0 C2.0 C3.0 C4.0 C5.0 C6.0 C7.0 C8.0 C9.0 C10.0 C11.0 C12.0 C13.0 C14.0 C15.0 C16.0 C17.0 C18.0 C19.0 C20.0 D1.0 D2.0 D3.0 D4.0 D5.0 L1.0 R3.0 R4.0 R5.0 R6.0 R7.0 R8.0 R9.0 R10.0 R11.0 R12.0 R13.0 R14.0 R15.0 R16.0 R17.0 R18.0 RN1.0 RN1.4 RN1.5 RN2.0 RN2.3 RN2.6 U2.2 U2.3 U2.4 U2.6 U2.14 U2.15 U2.16 U2.17 U2.20 U2.21 U2.22 U2.23 U2.27 U2.33 U2.34 U2.35 U2.36 U2.37 U2.38 U2.39 U2.40 U2.41 U2.50 U2.51 U2.52 U2.53 U2.54 U2.55 U2.56 U2.57 U3.1 U3.2 U3.3 U4.0 U4.8 USB1.0 USB1.4

## Polygon pours and split planes (outlines as drawn)
GND on Bottom Layer "GND_L04_P018" (solid, pour order 18): 110,80 110,50 74,50 70,54 70,75.4 74.6,80
3V3 on Bottom Layer "3V3_L04_P014" (solid, pour order 14): 97.158,62.918 99.182,62.918 100,62.1 100,57 99.118,56.118 97.778,56.118 96.314,57.582 96.314,62.074
NetL1_1 on Bottom Layer "NETL1_1_L04_P002" (solid, pour order 2): 100.9,61.8 101.3,62.2 104.5,62.2 104.7,62 104.7,61.359 103.659,61.359 102.7,60.4 102.7,59.8 102.5,59.6 101.3,59.6 100.9,60
GND on Top Layer "GND_L01_P012" (solid, pour order 12): 109.8,80 109.8,50 72.6,50 70,52.6 70,75.2 74.8,80
NetD1_A on Top Layer "NETD1_A_L01_P000" (solid, pour order 0): 105.2,68.4 105.2,67.8 102.8,65.4 100.8,65.4 100.4,65.8 100.4,67.2 100.8,67.6 102.8,67.6 103.6,68.4
GND on Signal Layer 1 "GND_L02_P004" (solid, pour order 4): 75,80 109.8,80 109.8,50 74,50 70,54 70,75
3V3 on Signal Layer 2 "3V3_L03_P008" (solid, pour order 8): 74.6,80 109.8,80 109.8,50 74.6,50 70,54.6 70,75.4
no net on Top Solder "NONET_L-01_P-001" (solid): 110.2,59.6 116.2,59.6 116.2,56.4 110.2,56.4
no net on Top Solder "NONET_L-01_P-001" (solid): 110.4,59.6
no net on Top Solder "NONET_L-01_P-001" (solid): 110.4,59.6

## Keep-outs
Top Layer:
  lines w0.1: 70,78 70,78
Keep-Out Layer:
  lines w0.1: 110,65.8 110,65 110.8,64.2 115.2,64.2 116.4,63 116.4,51.6 114.8,50 71.8,50 70,51.8 70,78 72,80 114.6,80 ; 110,65.8 110,65.8 ; 110,65.8 105.894,65.8 105.403,66.29 105.403,73.11 105.893,73.6 110,73.6 110,74.4 110.808,75.208 115.592,75.208 116.4,76.016 116.4,78.2 114.6,80 ; 114.6,80 114.6,80

## Other copper
Top Layer:
  pour cut-out: 77.4,68.4 81,68.4 81,72.4 77.4,72.4
  text "Henry Lau" at 110.6,58.792 h0.6
  text "CAN Master" at 110.4,57.8 h0.6
  text "Ver 1.0" at 111.4,56.833 h0.6

## Silkscreen, mask and mechanical layers (free items; w line width, h text height)
Top Overlay:
  text "I2C" at 89.8,77.6 h0.4 r90
  text "3V3 GND SDA SCL" at 90.6,75.8 h0.4
  text "SWCLK GND SWDIO" at 97,75.4 h0.4
  text "GND CAN_L CAN_H 5V" at 80.4,75 h0.4
  text "MASTER" at 80.526,73.8 h1
  text "3V3" at 73.2,72.2 h0.4
  text "PC10" at 73.4,69 h0.4 r270
  text "PC11" at 73.4,66.4 h0.4 r270
  text "PC12" at 73.4,64 h0.4 r270
  text "PC13" at 73.4,61.456 h0.4 r270
  text "RST" at 75,58.8 h1 r270
  text "GND" at 73.2,56.8 h0.4
  text "3V3 TX RX GND" at 102,56.4 h0.6

## Text inside footprints (layer, text, board x,y; h text height)
D1: Top Overlay "A" at 102.9,66.444 h0.4 r270; Top Overlay "K" at 102.9,63.444 h0.4 r270
D2: Top Overlay "K" at 81.938,53.4 h1 r90; Top Overlay "A" at 81.938,51.3 h1 r90
D3: Top Overlay "K" at 85.138,53.4 h1 r90; Top Overlay "A" at 85.138,51.3 h1 r90
D4: Top Overlay "K" at 88.1,53.447 h1 r90; Top Overlay "A" at 88.1,51.347 h1 r90
D5: Top Overlay "K" at 103.528,61.352 h1; Top Overlay "A" at 101.428,61.352 h1